# Altium PCB PCB_V№3.PcbDoc
Units mm, origin at the board's own origin, x right, y up, seen from the top; angles counter-clockwise.
Board outline 70 x 20 mm, 2 copper layers (Top Layer, Bottom Layer); 19 components, 24 nets, 106 pads, 76 vias.
Unrouted connection lines stored in the file: 1.
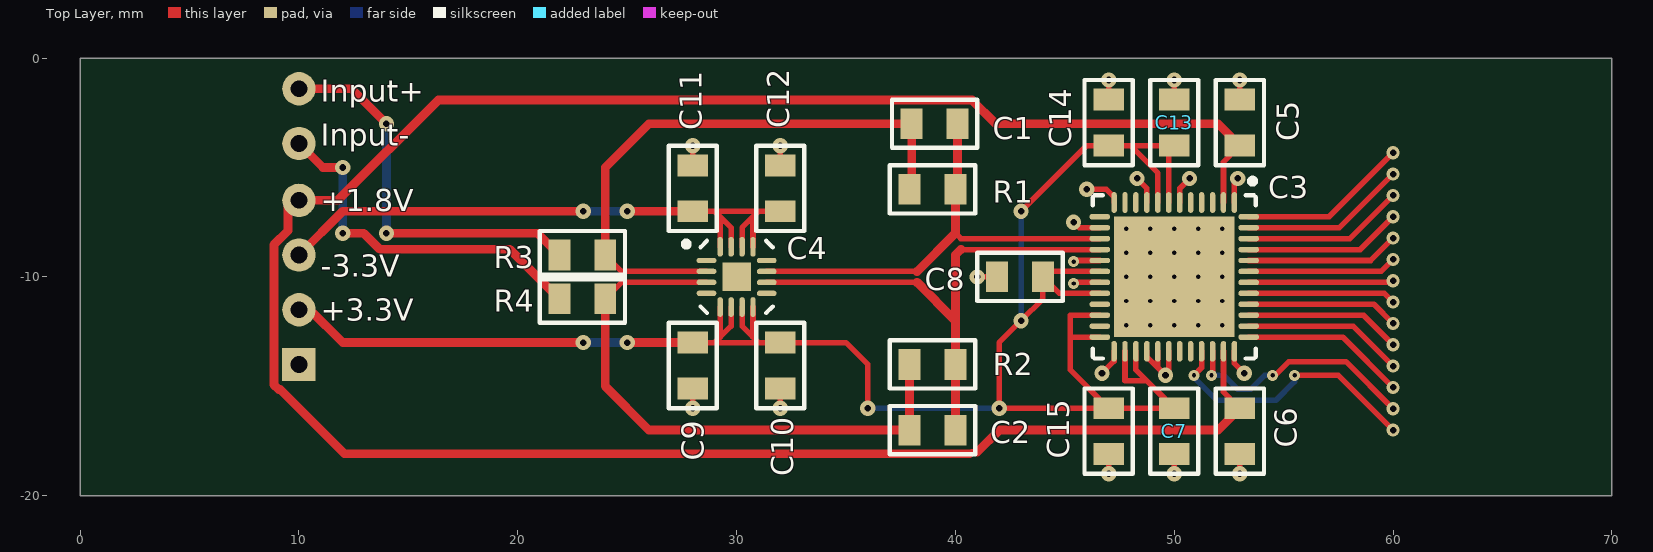
[diagram p0: Top Layer view]
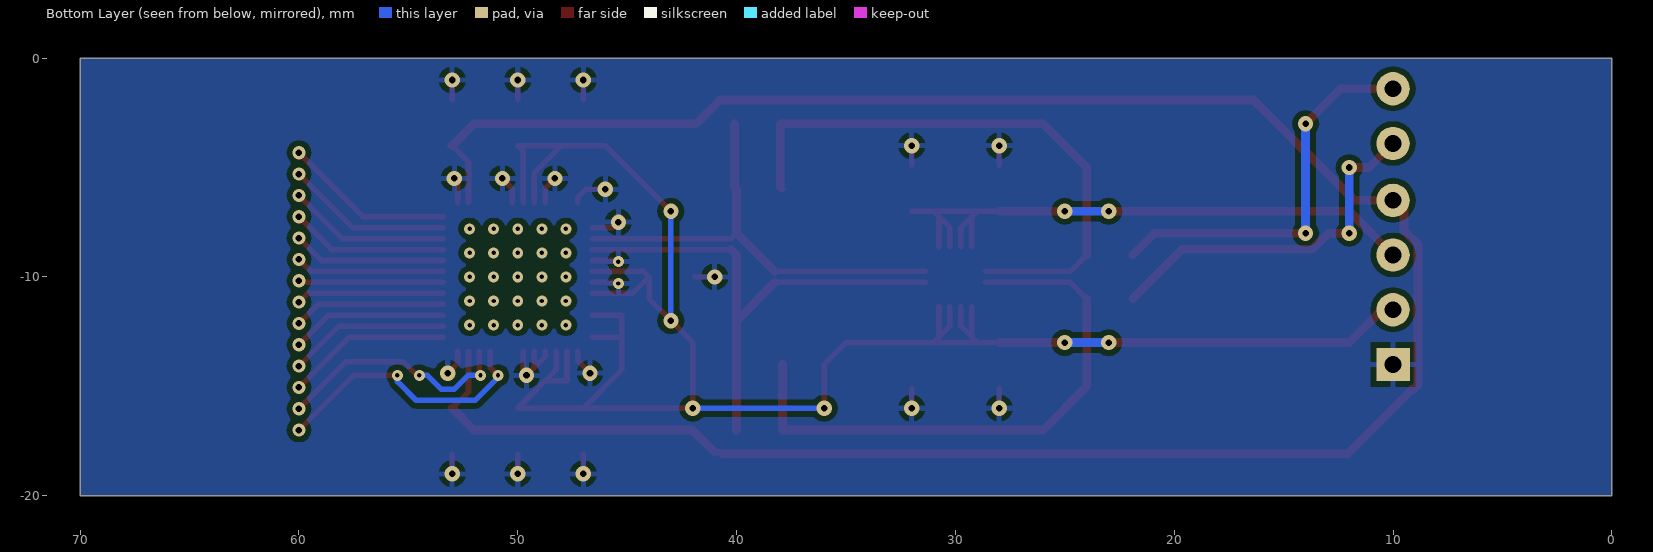
[diagram p1: Bottom Layer view, seen from below]

## Layer stack, top to bottom
Top Solder: solder mask 0.0102, Solder Resist, Dk 3.5
Top Layer: signal copper 0.0356
Dielectric 1: dielectric 0.32, FR-4, Dk 4.8
Bottom Layer: signal copper 0.0356
Bottom Solder: solder mask 0.0102, Solder Resist, Dk 3.5

## Board outline
0,-20 70,-20 70,0 0,0

## Design rules (kind name [scope] priority, off if disabled: settings)
Clearance [All] p1: gap=0.254
PolygonConnect [All] p1: connectstyle=Relief reliefconductorwidth=0.254 reliefentries=4 polygonreliefangle="90 Angle" airgapwidth=0.254
RoutingVias [All] p1: holewidth=0.711 width=1.27 viastyle="Through Hole" minholewidth=0.711 minwidth=1.27 maxholewidth=0.711 maxwidth=1.27
SolderMaskExpansion [All] p1: expansion=0.102
UnpouredPolygon [All] p1: allowunpoured=FALSE
Width [All] p1: maxlimit=0.254 minlimit=0.254 preferedwidth=0.254
29 further rules are at their usual default settings.

## Classes and differential pairs
component class Sheet_V¹3: C1 C2 C3 C4 C6 C7 C8 C9 C10 C11 C12 C13 C14 C15 R1 R2 R3 R4

## Components (designator, comment, footprint, x,y, rotation, side; value= is the part's Value field where it differs from the comment)
C1 "0.1u" Capacitor 39,-3 r180 top
C2 "0.1u" Capacitor 39,-17 r0 top
C3 "ADS61B49" ADS61B49 50,-10 r270 top
C4 "ADA4932-1" CP-16-2 30,-10 r0 top
C5 "0.1u" Capacitor 53,-3 r270 top
C6 "0.1u" Capacitor 53,-17 r90 top
C7 "0.1u" Capacitor 50,-17 r90 top
C8 "0.1u" Capacitor 43,-10 r0 top
C9 "0.1u" Capacitor 28,-14 r90 top
C10 "0.1u" Capacitor 32,-14 r90 top
C11 "0.1u" Capacitor 28,-6 r270 top
C12 "0.1u" Capacitor 32,-6 r270 top
C13 "0.1u" Capacitor 50,-3 r270 top
C14 "0.1u" Capacitor 47,-3 r270 top
C15 "0.1u" Capacitor 47,-17 r90 top
R1 "PARAM" Resistor 39,-6 r0 top
R2 "PARAM" Resistor 39,-14 r0 top
R3 "PARAM" Resistor 23,-9 r0 top
R4 "PARAM" Resistor 23,-11 r0 top

## Footprints (in the part's own frame and the unit in brackets; to place one, negate y for a bottom-side part, rotate by r counter-clockwise, add the part's x,y. Pads: shape width x height; smd on the part's side, far side on the other; paste and mask are expansions set on the pad)
ADS61B49 [mm] "ADS61B49"
  oval 0.95x0.25 smd: 1(-3.4,2.75) 2(-3.4,2.25) 3(-3.4,1.75) 4(-3.4,1.25) 5(-3.4,0.75) 6(-3.4,0.25) 7(-3.4,-0.25) 8(-3.4,-0.75) 9(-3.4,-1.25) 10(-3.4,-1.75) 11(-3.4,-2.25) 12(-3.4,-2.75) 25(3.4,-2.75) 26(3.4,-2.25) 27(3.4,-1.75) 28(3.4,-1.25) 29(3.4,-0.75) 30(3.4,-0.25) 31(3.4,0.25) 32(3.4,0.75) 33(3.4,1.25) 34(3.4,1.75) 35(3.4,2.25) 36(3.4,2.75)
  oval 0.25x0.95 smd: 13(-2.75,-3.4) 14(-2.25,-3.4) 15(-1.75,-3.4) 16(-1.25,-3.4) 17(-0.75,-3.4) 18(-0.25,-3.4) 19(0.25,-3.4) 20(0.75,-3.4) 21(1.25,-3.4) 22(1.75,-3.4) 23(2.25,-3.4) 24(2.75,-3.4) 37(2.75,3.4) 38(2.25,3.4) 39(1.75,3.4) 40(1.25,3.4) 41(0.75,3.4) 42(0.25,3.4) 43(-0.25,3.4) 44(-0.75,3.4) 45(-1.25,3.4) 46(-1.75,3.4) 47(-2.25,3.4) 48(-2.75,3.4)
  rect 5.5x5.5 smd: 49(0,0)
  silkscreen extent -4.5,-3.72 3.72,3.73, body extent -3.58,-3.57 3.57,3.58, height 1
Capacitor [mm] "C?"
  rect 1x1.4 smd: 1(-1.1,0) 2(1,0)
  silkscreen extent -2,-1.1 1.9,1.1
CP-16-2 [mm] "QFN, 16-Leads, Body 3,00x3,00mm, Pitch 0,50mm, Thermal Pad 1,30x1,30mm, IPC Medium Density"
  oval 0.9x0.25 smd: 1(-1.375,0.75) 2(-1.375,0.25) 3(-1.375,-0.25) 4(-1.375,-0.75) 9(1.375,-0.75) 10(1.375,-0.25) 11(1.375,0.25) 12(1.375,0.75)
  oval 0.25x0.9 smd: 5(-0.75,-1.375) 6(-0.25,-1.375) 7(0.25,-1.375) 8(0.75,-1.375) 13(0.75,1.375) 14(0.25,1.375) 15(-0.25,1.375) 16(-0.75,1.375)
  rect 1.3x1.3 smd: 17(0,0)
  silkscreen extent -2.42,-1.65 1.65,1.65, body extent -1.5,-1.5 1.5,1.5, height 1
Resistor [mm] "R?"
  rect 1x1.4 smd: 1(-1.1,0) 2(1,0)
  silkscreen extent -2,-1.1 1.9,1.1

## Part data
C1 C2 C5 C6 C7 C8 C9 C10 C11 C12 C13 C14 C15: library part Capacitor
R1 R2 R3 R4: library part Resistor

## Free pads (board coordinates)
  round 1.524 hole 0.762: 0(10,-3.9) 0(10,-1.4) 0(10,-6.5) 1(10,-9) 2(10,-11.5)
  rect 1.524x1.524 hole 0.762: 3(10,-14)

## Via types
v1: diameter 0.7, hole 0.3, Top Layer to Bottom Layer, 31 vias
v2: diameter 0.5, hole 0.2, Top Layer to Bottom Layer, 31 vias
v3: diameter 0.6, hole 0.3, Top Layer to Bottom Layer, 14 vias

## Nets (pads, with @x,y where several pads share a name; then routed paths per layer and width w, separated by ;. In a path a pad name is that pad's centre, name@x,y a point inside that pad or via, vN(x,y) a via of type N, cw(c..) or ccw(c..) an arc to the next point about the centre after c; other vN are vias at no path point)
+1.8V: C3.2 C3.35 C5.2 C6.2 pad.0@10,-6.5 | length 107.1
  Top Layer w0.254: pad.0@9.5,-6.5 pad.0@10,-6.5 ; 40.658,-18.081 40.739,-18 41,-18 ; C3.35 52.25,-15.25 C6.2 ; C3.2 52.25,-4.75 C5.2
  Top Layer w0.4: pad.0@9.5,-6.5 9.5,-7.884 8.857,-8.527 8.857,-14.92 9.08,-15.143 9.143,-15.143 12.081,-18.081 40.658,-18.081 ; pad.0@10,-6.5 11.782,-6.5 16.363,-1.919 40.758,-1.919 41.839,-3 52,-3 C5.2 ; 41,-18 42,-17 52,-17 C6.2
+3.3V: C3.7 C3.8 C3.18 C3.20 C3.22 C3.24 C3.26 C3.27 C4.5 C4.6 C4.7 C4.8 C7.2 C8.2 C9.2 C10.2 C13.2 C14.2 C15.2 pad.2 | length 96.3
  Top Layer w0.254: pad.2 pad.2@10.5,-11.5 ; C9.2 29,-13 ; C4.5 29.25,-12.75 ; C4.6 29.75,-12.25 29.25,-12.75 ; C4.7 30.25,-12.25 30.75,-12.75 ; C4.8 30.75,-12.75 ; v1(36,-16) 36,-14 35,-13 C10.2 31,-13 ; v1(43,-7) 46,-4 C14.2 48,-4 ; C3.24 45.25,-12.75 ; C3.22 45.25,-11.75 45.25,-12.75 ; C3.20 44.75,-10.75 C8.2 ; C3.18 44.25,-9.75 C8.2 ; C3.26 47.75,-14.75 48.75,-14.75 C7.2 ; C3.27 48.25,-14.25 C7.2 ; C3.8 49.25,-5.25 48,-4 ; C3.7 49.75,-4.25 C13.2 48,-4 ; 29,-13 31,-13 ; 29,-13 29.25,-12.75 ; 30.75,-12.75 31,-13 ; C8.2 44,-11 v1(43,-12) 42,-13 v1(42,-16) C15.2 ; 45.25,-12.75 45.25,-14.25 C15.2 ; C15.2 C7.2
  Top Layer w0.4: pad.2@10.5,-11.5 12,-13 v1(23,-13) ; v1(25,-13) C9.2
  Bottom Layer w0.254: v1(36,-16) v1(42,-16) ; v1(43,-12) v1(43,-7)
  Bottom Layer w0.4: v1(23,-13) v1(25,-13)
-3.3V: C4.13 C4.14 C4.15 C4.16 C11.2 C12.2 pad.1 | length 29.4
  Top Layer w0.254: C11.2 29,-7 ; C4.16 29.25,-7.25 ; C4.15 29.75,-7.75 29.25,-7.25 ; C4.14 30.25,-7.75 30.75,-7.25 ; C4.13 30.75,-7.25 ; C12.2 31,-7 ; 29,-7 31,-7 ; 29,-7 29.25,-7.25 ; 30.75,-7.25 31,-7
  Top Layer w0.4: pad.1 12,-7 v1(23,-7) ; v1(25,-7) C11.2
  Bottom Layer w0.4: v1(23,-7) v1(25,-7)
D0M: C3.33 | length 12.5
  Top Layer w0.254: v2(50.9,-14.5) 51.25,-14.15 C3.33 ; v2(55.5,-14.5) 57.5,-14.5 v3(60,-17)
  Bottom Layer w0.254: v2(50.9,-14.5) 50.9,-14.592 51.947,-15.639 54.639,-15.639 55.5,-14.778 v2(55.5,-14.5)
D0P: C3.34 | length 11.1
  Top Layer w0.254: v2(51.7,-14.5) 51.75,-14.45 C3.34 ; v2(54.5,-14.5) 54.608,-14.5 55.239,-13.869 57.844,-13.869 v3(60,-16.025)
  Bottom Layer w0.254: v2(51.7,-14.5) 52.266,-14.5 52.897,-15.131 53.503,-15.131 54.134,-14.5 v2(54.5,-14.5)
D2M: C3.37 | length 7.6
  Top Layer w0.254: C3.37 57.7,-12.75 v3(60,-15.05)
D2P: C3.38 | length 7.4
  Top Layer w0.254: C3.38 58.175,-12.25 v3(60,-14.075)
D4M: C3.39 | length 7.2
  Top Layer w0.254: C3.39 58.65,-11.75 v3(60,-13.1)
D4P: C3.40 | length 7
  Top Layer w0.254: C3.40 59.125,-11.25 v3(60,-12.125)
D6M: C3.41 | length 6.8
  Top Layer w0.254: C3.41 59.6,-10.75 v3(60,-11.15)
D6P: C3.42 | length 6.6
  Top Layer w0.254: C3.42 59.925,-10.25 v3(60,-10.175)
D8M: C3.43 | length 6.8
  Top Layer w0.254: C3.43 59.45,-9.75 v3(60,-9.2)
D8P: C3.44 | length 7
  Top Layer w0.254: C3.44 58.975,-9.25 v3(60,-8.225)
D10M: C3.45 | length 7.2
  Top Layer w0.254: C3.45 58.5,-8.75 v3(60,-7.25)
D10P: C3.46 | length 7.4
  Top Layer w0.254: C3.46 58.025,-8.25 v3(60,-6.275)
D12M: C3.47 | length 7.6
  Top Layer w0.254: C3.47 57.55,-7.75 v3(60,-5.3)
D12P: C3.48 | length 7.8
  Top Layer w0.254: C3.48 57.075,-7.25 v3(60,-4.325)
GND: C3.1 C3.6 C3.9 C3.12 C3.14 C3.17 C3.19 C3.25 C3.28 C3.29 C3.30 C3.36 C5.1 C6.1 C7.1 C8.1 C9.1 C10.1 C11.1 C12.1 C13.1 C14.1 C15.1 pad.3 | length 23.9
  Top Layer w0.254: v1(28,-16) C9.1 ; C11.1 v1(28,-4) ; v1(32,-16) C10.1 ; C12.1 v1(32,-4) ; v1(41,-10) C8.1 ; v2(45.4,-10.3) 45.45,-10.25 C3.19 ; v2(45.4,-9.3) 45.45,-9.25 C3.17 ; v1(45.4,-7.5) 45.65,-7.75 C3.14 ; v1(46.7,-14.4) 47.25,-13.85 C3.25 ; 46.9,-6 47.25,-6.35 C3.12 ; v1(47,-19) C15.1 ; C14.1 v1(47,-1) ; v1(48.3,-5.5) 48.75,-5.95 C3.9 ; C3.28 48.75,-13.65 49.25,-14.15 ; C3.29 49.25,-14.15 ; C3.30 49.75,-14.35 v1(49.6,-14.5) 49.25,-14.15 ; v1(50,-19) C7.1 ; C13.1 v1(50,-1) ; C3.6 50.25,-5.95 v1(50.7,-5.5) ; C3.36 52.75,-13.95 v1(53.2,-14.4) ; C3.1 52.75,-5.65 v1(52.9,-5.5) ; v1(53,-19) C6.1 ; C5.1 v1(53,-1)
  other v1: 46,-6
INPUT_SIGNAL+: pad.0@10,-1.4 R3.1 | length 18
  Top Layer w0.4: pad.0@10,-1.4 12.4,-1.4 v1(14,-3) ; v1(14,-8) 20.9,-8 R3.1
  Bottom Layer w0.4: v1(14,-8) v1(14,-3)
INPUT_SIGNAL-: pad.0@10,-3.9 R4.1 | length 16.6
  Top Layer w0.4: pad.0@10,-3.9 11.1,-5 v1(12,-5) ; v1(12,-8) 12.966,-8 13.697,-8.731 19.631,-8.731 R4.1
  Bottom Layer w0.4: v1(12,-8) v1(12,-5)
NetC1_1: C1.1 C3.15 C4.11 R1.2 | length 21.1
  Top Layer w0.254: C4.11 38.25,-9.75 ; 40,-8 40.25,-8.25 C3.15 ; R1.2 R1.2@40.1,-5.9
  Top Layer w0.4: 38.25,-9.75 40,-8 R1.2 ; R1.2@40.1,-5.9 C1.1
NetC1_2: C1.2 C4.2 R1.1 R3.2 | length 26.8
  Top Layer w0.254: R3.2 24.75,-9.75 C4.2 ; R1.1 R1.1@38,-5.9
  Top Layer w0.4: R3.2 24,-5 26,-3 C1.2 R1.1@38,-5.9
NetC2_1: C2.1 C4.3 R2.1 R4.2 | length 26.7
  Top Layer w0.254: R4.2 24.75,-10.25 C4.3
  Top Layer w0.4: R4.2 24,-15 26,-17 C2.1 R2.1
NetC2_2: C2.2 C3.16 C4.10 R2.2 | length 24.1
  Top Layer w0.254: C4.10 38.25,-10.25 ; 40.25,-8.75 C3.16
  Top Layer w0.4: 38.25,-10.25 40,-12 ; C2.2 R2.2 40,-12 ; 40.25,-8.75 40,-9 40,-12
pads on no net: C3.3 C3.4 C3.5 C3.10 C3.11 C3.13 C3.21 C3.23 C3.31 C3.32 C3.49 C4.1 C4.4 C4.9 C4.12 C4.17
copper on no net: | length 0.9
  Top Layer w0.254: 46,-6 46.9,-6
  other v2: 47.8,-12.2 48.9,-12.2 50,-12.2 51.1,-12.2 52.2,-12.2 47.8,-11.1 48.9,-11.1 50,-11.1 51.1,-11.1 52.2,-11.1 47.8,-10 48.9,-10 50,-10 51.1,-10 52.2,-10 47.8,-8.9 48.9,-8.9 50,-8.9 51.1,-8.9 52.2,-8.9 47.8,-7.8 48.9,-7.8 50,-7.8 51.1,-7.8 52.2,-7.8

## Polygon pours and split planes (outlines as drawn)
GND on Bottom Layer "GND" (solid, pour order 2): 0,0 70,0 70,-20 0,-20

## Silkscreen, mask and mechanical layers (free items; w line width, h text height)
Top Overlay:
  text "Input+" at 11,-2 h1
  text "Input-" at 11,-4 h1
  text "+1.8V" at 11,-7 h1
  text "-3.3V" at 11,-10 h1
  text "+3.3V" at 11,-12 h1